# Altium PCB main.PcbDoc
Units mil, origin at the board's own origin, x right, y up, seen from the top; angles counter-clockwise.
Board outline 6000 x 4000 mil, 2 copper layers (Top Layer, Bottom Layer); 44 components, 23 nets, 109 pads, 0 vias.
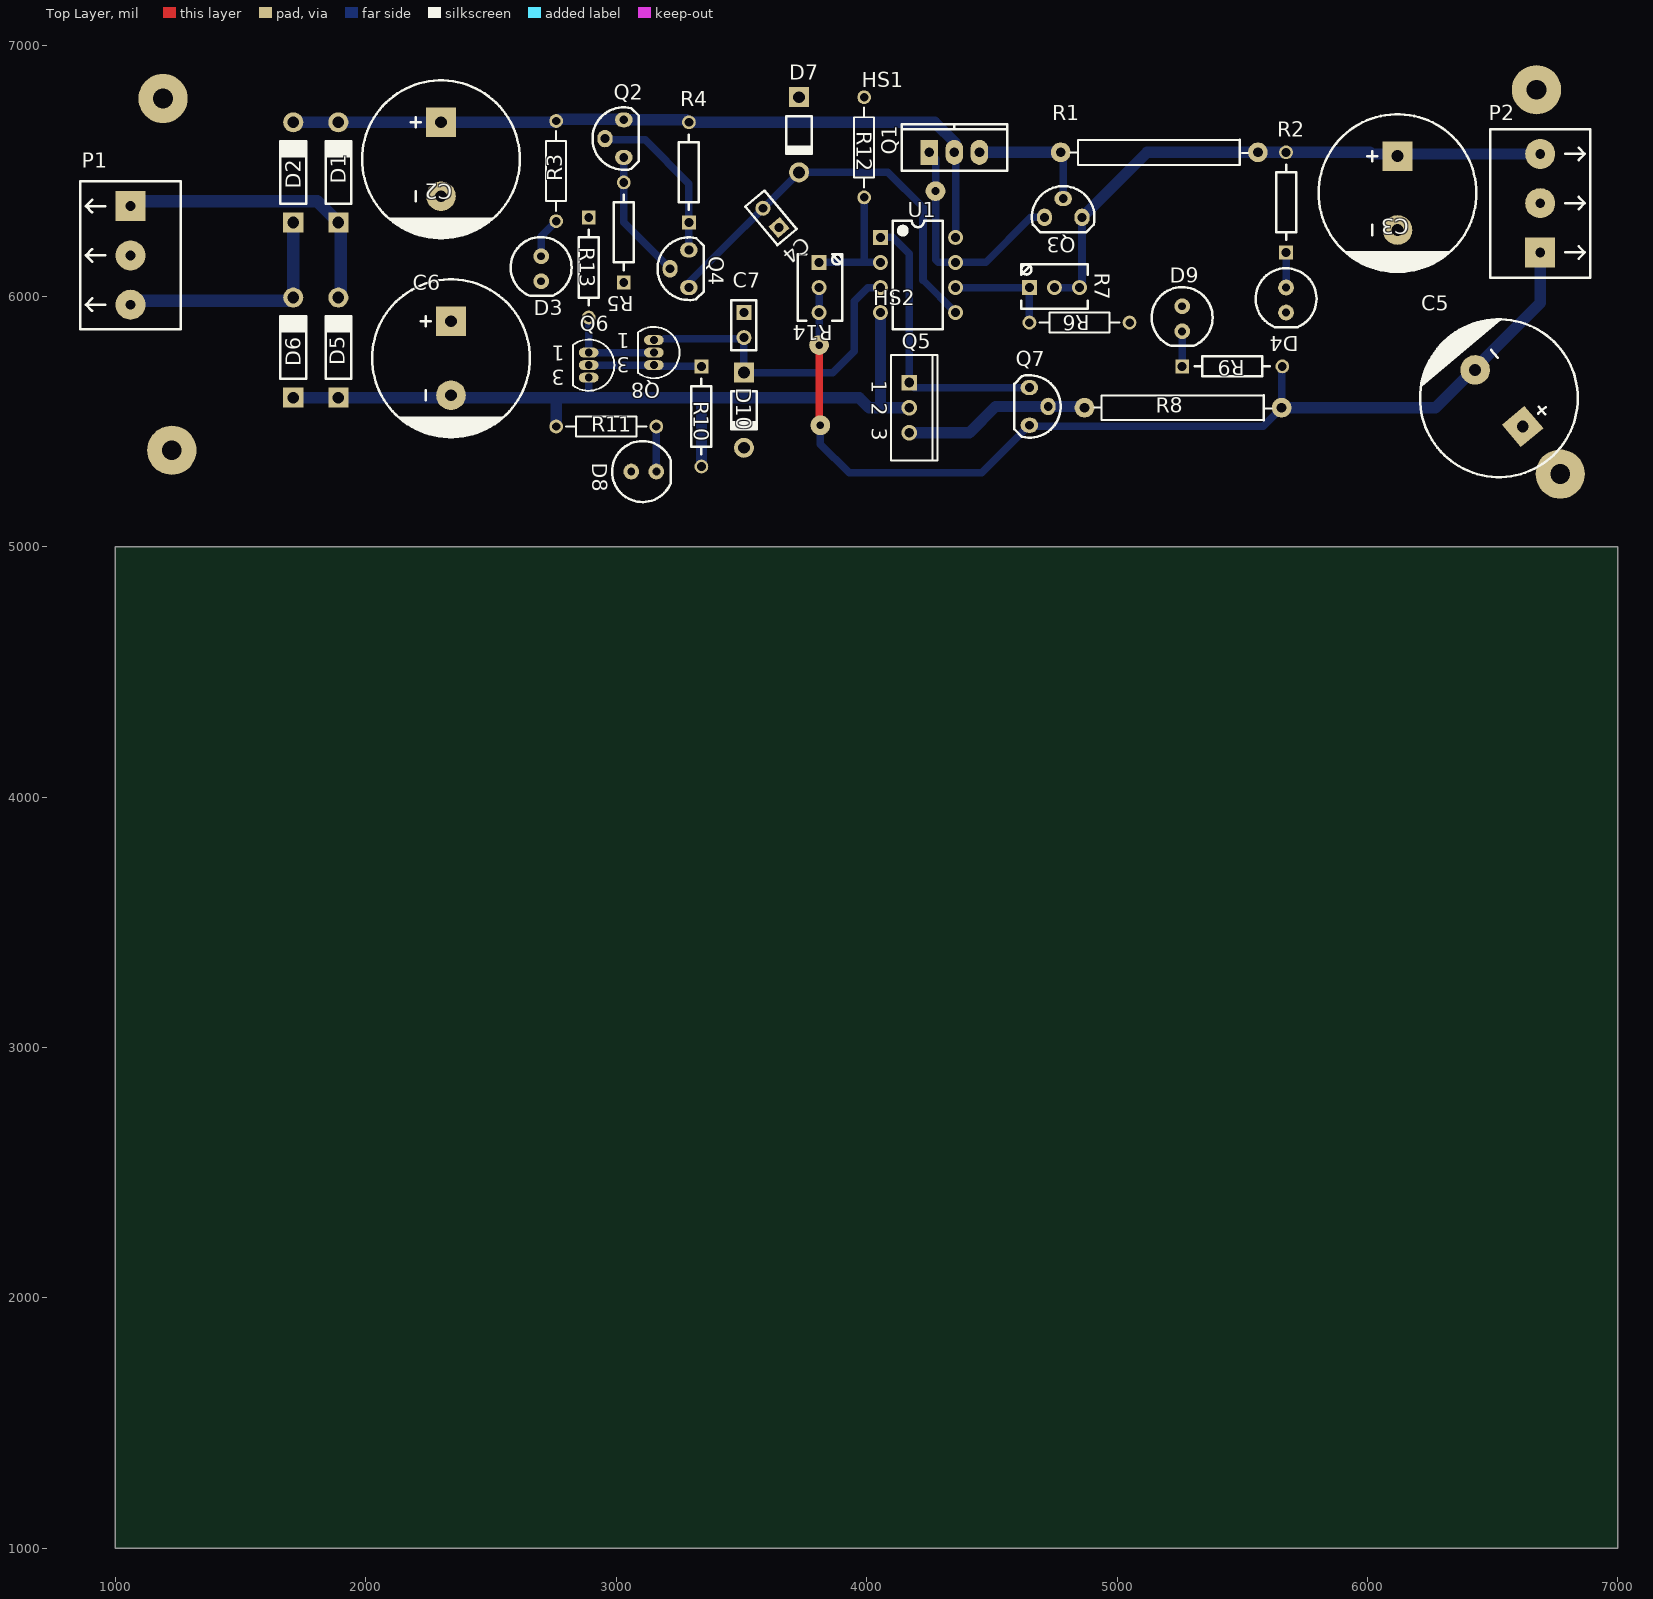
[diagram p0: Top Layer view]
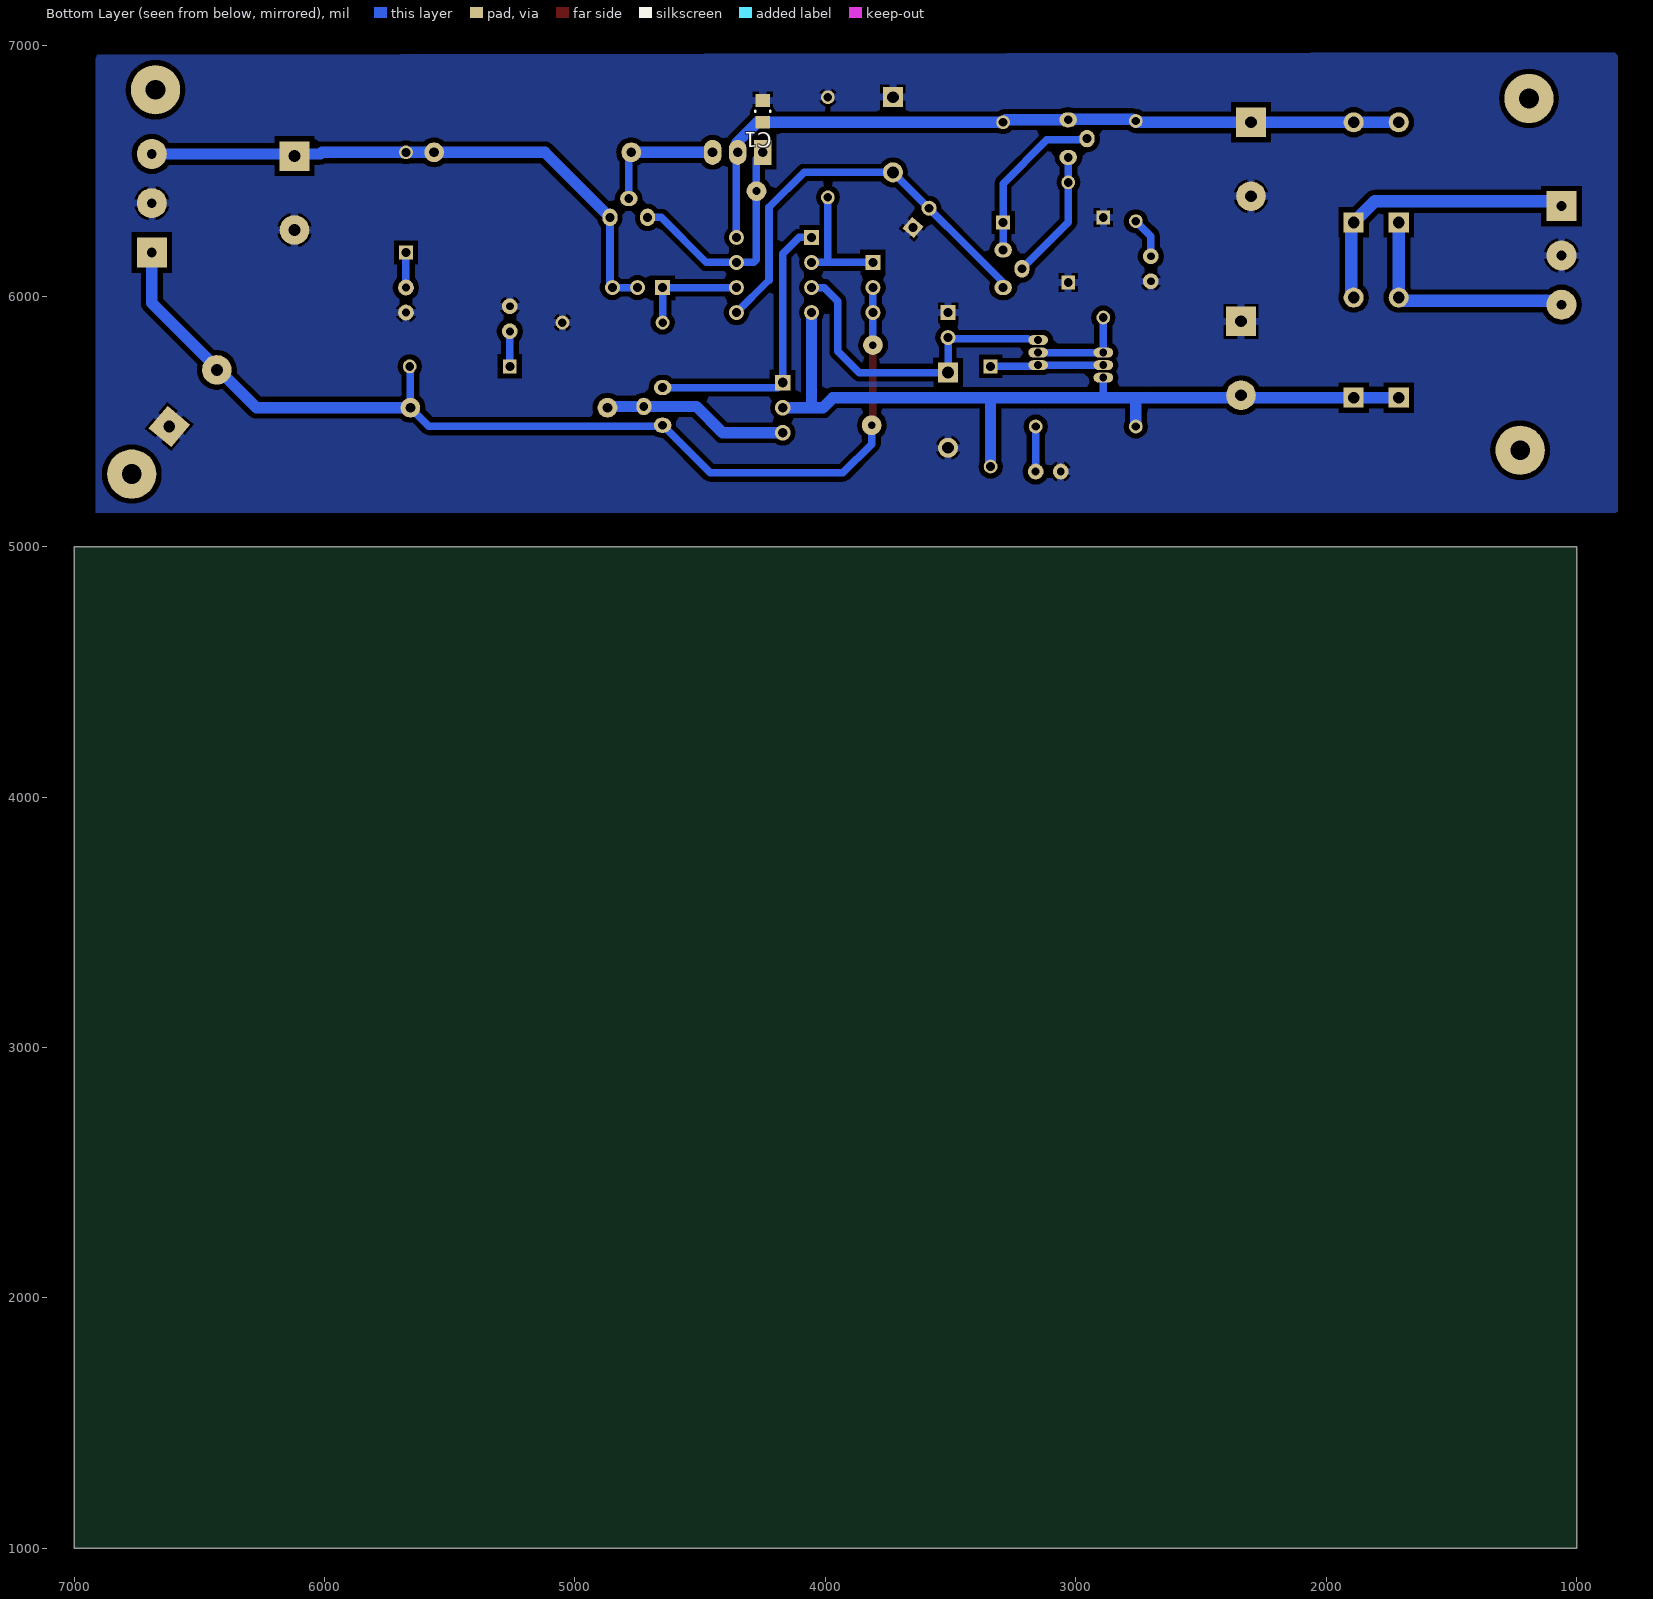
[diagram p1: Bottom Layer view, seen from below]

## Layer stack, top to bottom
Top Solder: solder mask 0.4, Solder Resist, Dk 3.5
Top Layer: signal copper 1.4
Dielectric1: dielectric 12.6, FR-4, Dk 4.8
Bottom Layer: signal copper 1.4
Bottom Solder: solder mask 0.4, Solder Resist, Dk 3.5

## Board outline
1000,1000 7000,1000 7000,5000 1000,5000

## Design rules (kind name [scope] priority, off if disabled: settings)
Clearance [All] p1: gap=20
DiffPairsRouting [All] p1: maxlimit=60 minlimit=30 mostfreqgap=30 toplayer_minwidth=15 toplayer_maxwidth=15 toplayer_prefwidth=15 bottomlayer_minwidth=15 bottomlayer_maxwidth=15 bottomlayer_prefwidth=15 maxuncoupledlength=500
PlaneClearance [All] p1: clearance=30
PlaneConnect [All] p1: planeconnectstyle=Relief reliefexpansion=30 reliefentries=4 reliefconductorwidth=30 reliefairgap=10
PolygonConnect [All] p1: connectstyle=Relief reliefconductorwidth=30 reliefentries=4 polygonreliefangle="90 Angle" airgapwidth=10
RoomDefinition main [InComponentClass('main')] p1: confinementstyle=ConfineIn formatcopy=TRUE lockcomponents=FALSE outline 7090,685 19360,685 19360,1675 7090,1675
RoutingLayers [All] p1: top layer_v5=FALSE bottom layer_v5=TRUE
RoutingVias [All] p1: holewidth=28 width=50 viastyle="Through Hole" minholewidth=28 minwidth=50 maxholewidth=28 maxwidth=50
SilkToSolderMaskClearance SilkscreenOverComponentPads [IsPad] p1: minsilkscreentomaskgap=10 clearancetoexposedcopper=TRUE
SolderMaskExpansion [All] p1: expansion=5
Width [All] p1: maxlimit=60 minlimit=30 preferedwidth=40 minimp=50.000000 maximp=50.000000 favimp=50.000000
25 further rules are at their usual default settings.

## Components (designator, comment, footprint, x,y, rotation, side; value= is the part's Value field where it differs from the comment)
C1 "100nF" 0805C 4250,6695 r90 bottom
C2 "1000u" CP-RAD-16.0mm-15.0mm-7.5mm 2300,6695 r270 top
C3 "1000u" CP-RAD-16.0mm-31.5mm-7.5mm 6120,6560 r270 top
C4 "100n" C100-200-100 3650,6275 r130 top
C5 "1000u" CP-RAD-16.0mm-15.0mm-7.5mm 6620,5480 r130 top
C6 "1000u" CP-RAD-16.0mm-15.0mm-7.5mm 2340,5900 r270 top
C7 "100n" C100-200-100 3510,5935 r270 top
D1 "1N4007" DO-41-Plastic 1890,6295 r90 top
D2 "1N4007" DO-41-Plastic 1710,6295 r90 top
D3 "LED3" "LED 5mm" 2700,6160 r0 top
D4 "LED3" "LED 5mm" 5675,6035 r0 top
D5 "1N4007" DO-41-Plastic 1890,5595 r90 top
D6 "1N4007" DO-41-Plastic 1710,5595 r90 top
D7 "1N4728A" DO-41-Glass 3730,6795 r270 top
D8 "LED3" "LED 5mm" 3060,5300 r90 top
D9 "LED3" "LED 5mm" 5260,5960 r0 top
D10 "1N4728A" DO-41-Glass 3510,5695 r270 top
HS1 "HS-TO-220" HS-TO-220-180847 4350,6735 r0 top
HS2 "HS-TO-220" HS-TO-220-180847 4370,5555 r270 top
P1 "SourceAC" KRE_3 1060,6360 r270 top
P2 "Vout" KRE_3 6690,6175 r90 top
Q1 "TIP127" TO-220/BCE 4250,6575 r0 top
Q2 "BC212" TO-92/CBE 3030,6555 r90 top
Q3 "BC548" TO-92/CBE 4710,6315 r0 top
Q4 "BC212" TO-92/CBE 3290,6035 r90 top
Q5 "TIP42C" TO-220AB 4170,5555 r270 top
Q6 "BC548B" 29-04 2890,5725 r180 top
Q7 "BC212" TO-92/CBE 4650,5635 r270 top
Q8 "BC548B" 29-04 3150,5775 r180 top
R1 "3R6" "Res Axial 1W" 4775,6575 r0 top
R2 "Value" R400-2.0mm 5675,6175 r90 top
R3 "Res2" AXIAL-0.4 2760,6500 r90 top
R4 "36R" R400-2.0mm 3290,6295 r90 top
R5 "47K" R400-2.0mm 3030,6055 r90 top
R6 "Res2" AXIAL-0.4 4850,5895 r180 top
R7 "10k" Trimpot-3266Y 4650,6035 r0 top
R8 "3R6" "Res Axial 1W" 4870,5555 r0 top
R9 "Value" R400-2.0mm 5260,5720 r0 top
R10 "36R" R400-2.0mm 3340,5720 r270 top
R11 "Res2" AXIAL-0.4 2960,5480 r180 top
R12 "Res2" AXIAL-0.4 3990,6595 r270 top
R13 "47K" R400-2.0mm 2890,6315 r270 top
R14 "10k" Trimpot-3266Y 3810,6135 r270 top
U1 "LM358" DIP08-300(100) 4055,6235 r270 top

## Footprints (in the part's own frame and the unit in brackets; to place one, negate y for a bottom-side part, rotate by r counter-clockwise, add the part's x,y. Pads: shape width x height; smd on the part's side, far side on the other; paste and mask are expansions set on the pad)
29-04 [mm] "TO, Flat Index; 3 In-Line, Axial Leads; Body Dia. 4.8mm; Leads 0.48 x 0.5 mm (max)"
  oval 2x1 hole 0.8: 1(0,-1.27) 2(0,0) 3(0,1.27)
  silkscreen extent -2.6,-2.6 1.6,2.6
0805C [mm] "Chip Capacitor; Body 2 x 1.3 mm (LxW typ)"
  rect 1.3x1.5 smd: 1(0,0) 2(2.2,0)
  silkscreen extent 1.05,-0.76 1.15,0.76, body extent 0.1,-0.64 2.1,0.62, height 0.78
AXIAL-0.4 [mm] "Axial Device, Thru-Hole; 2 Leads; 0.4 in Pin Spacing"
  round 1.4 hole 0.85: 1(-5.08,0) 2(5.08,0)
  silkscreen extent -4.06,-1.02 4.06,1.02
C100-200-100 [mil] "Radial Cap, Thru-Hole; 2 Leads; 0.1 in Pin Spacing"
  rect 60x60 hole 35.43: 1(0,0)
  round 60 hole 35.43: 2(100,0)
  silkscreen extent -50,-50 150,50, body extent -65,-115 165,112, height 245
CP-RAD-16.0mm-15.0mm-7.5mm [mm] "Radial Capacitor; D 16.0mm; L 15.0mm; P 7.5mm"
  rect 3x3 hole 1.2: 1(0,0)
  round 3 hole 1.2: 2(7.5,0)
  silkscreen extent -4.25,-8 11.75,8
CP-RAD-16.0mm-31.5mm-7.5mm [mm] "Radial Capacitor; D 16.0mm; L 31.5mm; P 7.5mm"
  rect 3x3 hole 1.2: 1(0,0)
  round 3 hole 1.2: 2(7.5,0)
  silkscreen extent -4.25,-8 11.75,8
DIP08-300(100) [mil] "DIP; 8 Leads; Row Spacing 7.62 mm; Pitch 2.54 mm"
  rect 60x60 hole 35.43: 1(0,0)
  round 60 hole 35.43: 2(100,0) 3(200,0) 4(300,0) 5(300,300) 6(200,300) 7(100,300) 8(0,300)
  silkscreen extent -67,50 367,249, body extent -47,-3 342,305, height 169
DO-41-Glass [mil] "Diode, Axial; Body 4.1 x 2.6 mm (LxDia. max), Lead Dia. 0.86 mm (max), Lead Spacing 7.62 mm; 3D Julien THIEREN"
  rect 80x80 hole 47.24: A(0,0)
  round 80 hole 47.24: K(300,0)
  silkscreen extent 75,-51 225,51, body extent -15,-53 316,52, height 111
DO-41-Plastic [mil] "Diode, Axial; Body 4.1 x 2.6 mm (LxDia. max), Lead Dia. 1.14 mm (max), Lead Spacing 10.16 mm; 3D Wagner Bernardo"
  rect 80x80 hole 47.24: A(0,0)
  round 80 hole 47.24: K(400,0)
  silkscreen extent 75,-52 325,51, body extent -15,-55 419,51, height 112
HS-TO-220-180847 [mil] "Heatsink TO-220 180847 180847 19x9.5x19mm"
  body extent -374,-349 374,64, height 933
KRE_3 [mil] "Terminal Block 3 pins"
  rect 120x120 hole 39.37: 1(0,0)
  round 120 hole 39.37: 2(196.85,0) 3(393.7,0)
  silkscreen extent -100,-200 492,200, body extent -123,-190 491,216, height 559
"LED 5mm" [mm]
  round 1.6 hole 0.8: A(0,0) K(0,-2.54)
  silkscreen extent -3.09,-4.02 3.09,1.95, body extent -2.04,-2.74 1.95,0.74, height 19.2
R400-2.0mm [mm] "Axial Device, Thru-Hole; 2 Leads; 0.4 in Pin Spacing"
  rect 1.4x1.4 hole 0.9: 1(0,0)
  round 1.4 hole 0.9: 2(10.16,0)
  silkscreen extent 1.27,-1.02 8.89,1.02, body extent -0.3,-1.17 10.46,1.14, height 2.93
"Res Axial 1W" [mm]
  round 2 hole 1: 1(0,0) 2(20,0)
  silkscreen extent 1.02,-1.27 18.97,1.25, body extent -0.5,-2.47 20.3,2.53, height 5.5
TO-92/CBE [mil] "Transistor Outline Package, Case Style 92 CBE; 3D Sergey Atanov"
  oval 70x60 hole 35.43: B(75,75)
  oval 60x70 hole 35.43: C(0,0) E(150,0)
  silkscreen extent -50,-60 200,125, body extent -37,-50 187,100, height 239
TO-220/BCE [mil] "TO, Thru-Hole, Vertical, Heatsink Mounted; 3 In-Line Leads; Pitch 2.54 mm"
  rect 70x100 hole 39.37: B(0,0)
  oval 70x100 hole 39.37: C(100,0) E(200,0)
  silkscreen extent -111,-73 311,112, body extent -121,-59 321,126, height 832
TO-220AB [mm] "TO, Thru-Hole, Vertical, Heatsink Mounted; 3 In-Line Leads; Pitch 2.54 mm"
  rect 1.6x1.6 hole 1: 1(-2.54,0)
  round 1.6 hole 1: 2(0,0) 3(2.54,0)
  silkscreen extent -5.35,-1.85 5.35,2.85
Trimpot-3266Y [mil] "Trimpot 3266Y"
  rect 60x60 hole 35.43: 1(0,0)
  round 60 hole 35.43: 2(100,0) 3(200,0)
  silkscreen extent -32,-85 232,92

## Part data
C1 C4 C7: library part Capacitor, "Capacitor"
C2 C3 C5 C6: library part Capacitor-Electrolytic, "Electrolytic Capacitor"
D1 D2 D5 D6: "General Purpose Rectifier"
D3 D4 D8 D9: "Typical BLUE SiC LED"
D7 D10: "Zener Diode"
HS1 HS2: "Heatsink TO-220"
P1 P2: library part KRE_3, "Terminal Block 1x3"
Q1 Q3: library part BC338, "NPN Epitaxial Silicon Transistor"
Q2 Q4: library part BC556, "PNP Epitaxial Silicon Transistor"
Q5 Q7: library part BC328, "PNP Epitaxial Silicon Transistor"
Q6 Q8: "Amplifier Transistor NPN Silicon"
R1 R2 R4 R5 R8 R9 R10 R13: library part Resistor, "Resistor"
R3 R6 R11 R12: "Resistor"
R7 R14: library part Potentiometer, "Potentiometer"
U1: "Dual Operational Amplifier"

## Free pads (board coordinates)
  round 78.74 hole 30: 3(3815,5485) 4(3810,5805)
  round 196.85 hole 78.74: 7(1190,6790) 7(1225,5385) 7(6675,6825) 7(6770,5290)
  round 78.74 hole 31.5: 8(4275,6420)

## Nets (pads, with @x,y where several pads share a name; then routed paths per layer and width w, separated by ;. In a path a pad name is that pad's centre, name@x,y a point inside that pad or via, vN(x,y) a via of type N, cw(c..) or ccw(c..) an arc to the next point about the centre after c; other vN are vias at no path point)
GND: C1.2 C2.2 C3.2 C4.1 C5.1 C6.1 C7.1 D3.K D4.K D7.A D8.A D9.A D10.K P1.2 P2.2 R5.1 R6.1 R12.1 R13.1
NetC4_2: C4.2 D7.K Q4.C U1.5 | length 1669.1
  Bottom Layer w30: Q4.C 3290,6055 D7.K 4085,6495 4225,6355 4225,6065 U1.5
NetC7_2: C7.2 D10.A Q8.1 U1.3 | length 1255.3
  Bottom Layer w30: 3192.34,5829.69 3510,5829.69 D10.A 3865,5695 3950,5780 3950,5980 4005,6035 U1.3
NetD1_A: D1.A D5.K P1.1 | length 1175.6
  Bottom Layer w30: D5.K D5.K@1900,6005
  Bottom Layer w50: P1.1@1060,6375 1065,6380 1805,6380 1900,6285 D5.K@1900,6005
NetD2_A: D2.A D6.K P1.3 | length 941.3
  Bottom Layer w50: P1.3@1055,5981.3 D6.K@1696.3,5981.3 ; D6.K D2.A
NetD3_1: D3.A R3.1 | length 164.9
  Bottom Layer w30: D3.A 2700,6240 R3.1
NetD4_1: D4.A R2.1 | length 140
  Bottom Layer w30: D4.A R2.1
NetD8_2: D8.K R11.1 | length 180
  Bottom Layer w30: D8.K R11.1
NetD9_2: D9.K R9.1 | length 140
  Bottom Layer w30: R9.1 D9.K
NetQ1_B: pad.8 Q1.B Q3.C U1.7 | length 954.1
  Bottom Layer w30: Q1.B 4275,6550 4275,6145 4285,6135 U1.7 4475,6135 4655,6315 Q3.C
NetQ1_E: Q1.E Q3.B R1.1 | length 514.1
  Bottom Layer w30: R1.1 4785,6565 Q3.B
  Bottom Layer w45: Q1.E R1.1
NetQ2_B: Q2.B Q4.E R4.1 | length 674.6
  Bottom Layer w30: Q2.B 2960,6625 3115,6625 3290,6450 R4.1 Q4.E
NetQ2_C: Q2.C Q4.B R5.2 | length 521.6
  Bottom Layer w30: Q2.C R5.2 3030,6295 Q4.B
NetQ5_B: Q5.1 Q7.C U1.1 | length 1116.9
  Bottom Layer w30: U1.1 4105,6235 4170,6170 Q5.1 ; Q5.1@4190,5635 Q7.C
NetQ5_E: Q5.3 Q7.B R8.1 | length 738.5
  Bottom Layer w45: Q5.3 4410,5455 4515,5560 Q7.B R8.1@4865,5560
NetQ6_1: Q6.1 Q8.2 R13.2 | length 380
  Bottom Layer w30: Q6.1@2890,5785 R13.2 ; Q6.1@2900,5775 Q8.2
NetQ6_2: Q6.2 Q8.3 R10.1 | length 444.7
  Bottom Layer w30: Q6.2@2895,5725 Q8.3 ; Q8.3@3150.32,5720 R10.1
NetR6_2: R6.2 R7.1 U1.6 | length 435
  Bottom Layer w30: U1.6 R7.1 R6.2
NetR12_2: R12.2 R14.1 U1.2 | length 500
  Bottom Layer w30: R14.1 U1.2 ; 3990,6140 R12.2
V+: C3.1 P2.3 Q3.E R1.2 R2.2 R7.2 R7.3 | length 2315.5
  Bottom Layer w30: R7.2 R7.3 4860,6045 Q3.E
  Bottom Layer w45: Q3.E 5120,6575 R1.2 R2.2 6010,6575 ; 6016.3,6568.7 P2.3
V-: C5.2 P2.1 pad.3 pad.4 Q7.E R8.2 R9.2 R14.2 R14.3 | length 4212.5
  Top Layer w30: pad.3@3810,5490 pad.4
  Bottom Layer w30: pad.4 R14.3 R14.2 ; pad.3 3815,5410 3930,5295 4460,5295 Q7.E 4654.37,5480.63 5583.03,5480.63 R8.2 R9.2@5657.4,5717.4 ; P2.1@6690,6160.2 P2.1@6682.6,6167.6 ; P2.1 P2.1@6682.6,6167.6 ; P2.1@6697.4,6167.6 P2.1@6682.6,6167.6
  Bottom Layer w45: R8.2 6272.2,5555 6690,5972.8 P2.1@6690,6160.2
VAC+: C1.1 C2.1 D1.K D2.K Q1.C Q2.E R3.2 R4.2 U1.8 | length 3052.3
  Bottom Layer w30: U1.8 Q1.C@4355,6611.57
  Bottom Layer w45: D2.K D1.K 2760,6695 2772.5,6707.5 3027.5,6707.5 Q2.E R4.2@3280,6705 ; R4.2 4271.57,6695 Q1.C@4355,6611.57
VAC-: C6.2 D5.A D6.A Q5.2 Q6.3 R10.2 R11.2 U1.4 | length 3312.2
  Bottom Layer w30: 2890,5595 Q6.3
  Bottom Layer w45: D6.A D5.A 2247.8,5595 ; 2252.2,5595 2710,5595 ; 2715,5595 2760,5595 ; R11.2 2760,5595 ; R10.2 3340,5590 ; U1.4 4055,5555 ; Q5.2 4055,5555 ; 2760,5595 2890,5595 3970,5595 4010,5555 4055,5555

## Polygon pours and split planes (outlines as drawn)
GND on Bottom Layer "Bottom Layer-No Net" (solid, pour order 1000): 835,6975 835,5141.41 843.34,5135 6914.14,5135 6914.14,6949.36 6935,6965.38

## Text inside footprints (layer, text, board x,y; h text height)
Q5: Top Overlay "3" at 4019.41,5474.69 h59.06 r270; Top Overlay "1" at 4019.41,5664.84 h59.06 r270; Top Overlay "2" at 4019.41,5574.69 h59.06 r270
Q6: Top Overlay "1" at 2794.68,5802.91 h59.05 r180; Top Overlay "3" at 2794.68,5706.61 h59.05 r180
Q8: Top Overlay "1" at 3054.68,5852.91 h59.05 r180; Top Overlay "3" at 3054.68,5756.61 h59.05 r180